# Altium PCB Red.PcbDoc (part 3 of 3)
Units mm, origin at the board's own origin, x right, y up, seen from the top; angles counter-clockwise.
Board outline 152.4 x 101.6 mm, 4 copper layers (Top Layer, VCC, GND, Bottom Layer); 97 components, 56 nets, 284 pads, 185 vias.
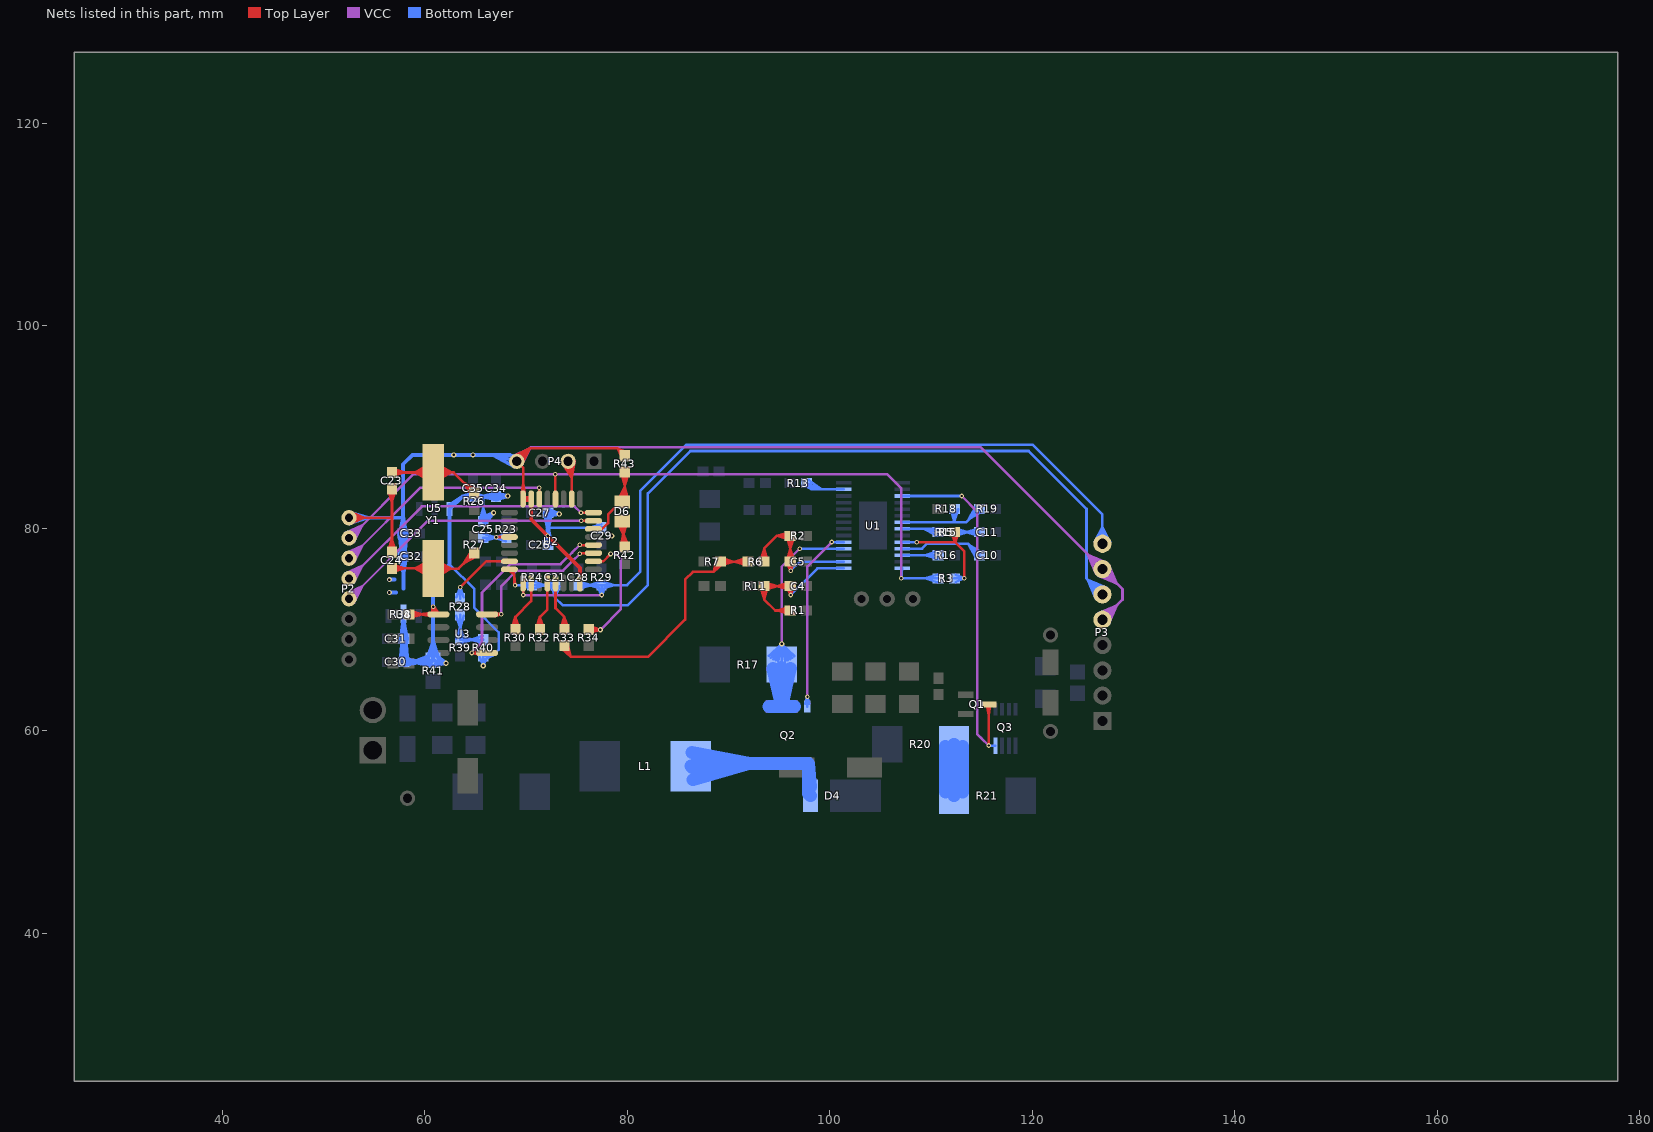
[diagram p5: the nets of this part, all layers, seen from the top]

## Via types
v1: diameter 0.457, hole 0.229, Top Layer to Bottom Layer, tented both sides, 92 vias
v2: diameter 0.508, hole 0.254, Top Layer to Bottom Layer, tented both sides, 85 vias
v3: diameter 0.508, hole 0.254, Top Layer to Bottom Layer, 8 vias

## Nets (pads, with @x,y where several pads share a name; then routed paths per layer and width w, separated by ;. In a path a pad name is that pad's centre, name@x,y a point inside that pad or via, vN(x,y) a via of type N, cw(c..) or ccw(c..) an arc to the next point about the centre after c; other vN are vias at no path point) (continued)
LP-: C23.2 C24.2 C25.1 C26.2 C27.1 C29.1 C30.1 C31.1 C32.1 C33.1 C34.1 C35.1 P2.8 P3.5 P3.7 P4.4 R38.1 R40.2 R41.1 R43.2 U2.16 U2.31 U2.32 U3.5 U4.2 U5.1 | length 441
  Top Layer w0.254: P2.8@52.518,81.041 54.03,81.026 ; P2.8@52.559,80.674 54.03,81.026 ; P2.8@52.567,81.407 54.03,81.026 ; P2.8@52.615,81.026 56.769,81.026 ; P2.8@52.64,80.43 54.03,81.026 ; P2.8@52.652,81.649 54.03,81.026 ; C24.2@56.4,77.74 56.769,78.947 ; C23.2@56.4,83.804 56.769,82.597 ; C24.2@56.769,77.635 56.769,81.026 ; C24.2@56.769,77.685 56.769,78.947 ; C23.2@56.769,83.859 56.769,82.597 ; C23.2@56.769,83.909 56.769,81.026 ; C24.2@57.138,77.74 56.769,78.947 ; C23.2@57.138,83.804 56.769,82.597 ; R38.1@58.458,71.501 U3.5@60.833,71.501 ; R38.1@58.508,71.501 59.77,71.501 ; R38.1@58.563,71.132 59.77,71.501 ; R38.1@58.563,71.87 59.77,71.501 ; U3.5@60.54,71.329 59.492,71.501 ; U3.5@60.54,71.673 59.492,71.501 ; U3.5@60.554,71.501 59.492,71.501 ; P4.4@68.731,87.124 70.358,87.884 ; P4.4@68.855,86.9 70.358,87.884 ; P4.4@69.088,86.614 70.358,87.884 ; P4.4@69.374,86.381 70.358,87.884 ; U2.32@69.569,83.476 69.717,84.502 ; P4.4@69.598,86.257 70.358,87.884 ; U2.32@69.717,83.465 69.717,84.502 ; U2.32@69.865,83.476 69.717,84.502 ; U2.31@70.476,82.748 U2.32@69.731,83.037 ; U2.31@70.476,83.032 U2.32@69.731,82.743 ; U2.31@70.503,82.743 U2.32@69.717,82.89 ; U2.31@70.503,83.037 U2.32@69.717,82.89 ; U2.31@70.531,82.743 U2.32@69.731,82.743 ; U2.31@70.531,83.037 U2.32@69.731,83.037 ; R43.2@79.455,86.99 79.032,87.884 ; R43.2@79.756,87.16 79.032,87.884 ; R43.2@79.756,87.21 79.032,87.884 ; R43.2@79.954,87.526 79.032,87.884 ; U2.32@69.717,82.89 69.717,85.985 69.215,86.487 69.215,86.741 70.358,87.884 ; U2.32@69.717,82.89 U2.31@70.517,82.89 ; U2.32@69.731,82.743 U2.31@70.517,82.89 ; U2.32@69.731,83.037 U2.31@70.517,82.89 ; 70.358,87.884 79.032,87.884
  Top Layer w0.381: U3.5@60.833,71.501 v1(60.833,72.263) U3.5@61.354,71.501 ; 70.517,80.897 U2.31@70.517,82.315 ; U2.31@70.517,82.89 70.517,80.867 75.317,76.067 ; U2.16@75.317,74.59 75.317,76.067 ; U2.16@75.317,75.165 75.317,76.067
  VCC w0.254: P4.4@68.729,87.123 70.377,87.903 ; P4.4@68.855,86.9 70.377,87.903 ; P4.4@69.088,86.614 70.485,88.011 114.883,88.011 P3.7@126.921,75.973 ; P4.4@69.374,86.381 70.377,87.903 ; P4.4@69.597,86.255 70.377,87.903 ; P3.7@126.281,75.54 125.482,77.412 ; P3.5@126.488,71.613 128.36,72.412 ; P3.7@126.488,75.333 128.36,74.534 ; P3.7@126.51,75.656 125.482,77.412 ; P3.5@126.604,71.384 128.36,72.412 ; P3.7@126.604,75.562 128.36,74.534 ; P3.7@126.722,75.798 125.482,77.412 ; P3.5@126.746,71.172 128.36,72.412 ; P3.7@126.746,75.774 128.36,74.534 ; P3.5@126.921,70.973 128.905,72.957 128.905,73.989 P3.7@126.921,75.973 ; P3.7@127.096,76.172 125.482,77.412 ; P3.5@127.12,70.798 128.36,72.412 ; P3.7@127.12,76.148 128.36,74.534 ; P3.7@127.238,76.384 125.482,77.412 ; P3.5@127.332,70.656 128.36,72.412 ; P3.7@127.332,76.29 128.36,74.534 ; P3.7@127.354,76.613 125.482,77.412 ; P3.5@127.561,70.54 128.36,72.412 ; P3.7@127.561,76.406 128.36,74.534 ; 125.482,77.412 P3.7@126.921,75.973
  Bottom Layer w0.254: 62.46,76.43 64.897,73.993 64.897,72.136 67.31,69.723 67.31,68.034 66.675,67.399 ; C25.1@65.417,80.788 65.786,81.995 ; R40.2@65.421,67.274 v2(65.786,66.421) ; R40.2@65.786,66.956 v2(65.786,66.421) ; R40.2@65.786,67.349 v2(65.786,66.421) ; R40.2@65.786,67.399 66.675,67.399 ; C25.1@65.786,80.683 65.786,83.147 ; C25.1@65.786,80.733 65.786,81.995 ; R40.2@65.864,67.034 66.675,67.399 ; R40.2@65.864,67.764 66.675,67.399 ; R40.2@66.151,67.274 v2(65.786,66.421) ; C25.1@66.155,80.788 65.786,81.995 ; 72.212,80.048 C29.1@77.47,80.048 ; C29.1@77.415,79.679 76.208,80.048 C29.1@77.415,80.417
  Bottom Layer w0.381: P2.8@52.518,81.041 54.411,81.041 ; P2.8@52.6,81.041 57.874,81.041 ; P2.8@52.601,80.488 54.411,81.041 ; P2.8@52.601,81.594 54.411,81.041 ; v2(56.515,73.66) 57.15,73.66 ; v2(56.515,74.93) 57.023,74.93 ; C33.1@57.515,79.499 57.684,77.798 ; C33.1@57.565,79.481 C32.1@57.874,77.216 ; C33.1@57.566,79.531 57.874,81.145 C33.1@58.182,79.531 ; C32.1@57.567,77.18 57.912,75.572 ; C32.1@57.567,77.252 57.912,78.86 ; C33.1@57.567,79.466 57.912,77.858 ; C33.1@57.566,79.533 57.874,81.041 ; C30.1@57.591,66.804 57.756,68.463 ; C33.1@57.62,79.444 58.079,77.861 ; C30.1@57.642,66.831 57.95,68.445 C30.1@58.258,66.831 ; C31.1@57.642,69.059 57.95,67.445 ; C31.1@57.641,69.11 U4.2@57.912,70.732 ; C30.1@57.695,66.857 58.144,68.463 ; C31.1@57.703,69.478 U4.2@57.912,70.952 ; C33.1@57.824,79.502 57.684,77.798 ; C30.1@57.9,66.802 57.756,68.463 ; C31.1@57.912,69.509 U4.2@57.912,70.952 ; U4.2@57.912,71.552 57.912,69.126 C31.1@57.95,69.088 ; 57.912,74.041 57.912,79.464 C33.1@57.874,79.502 ; C31.1@57.94,69.508 U4.2@57.912,70.952 ; C30.1@58.029,66.494 59.643,66.802 ; C30.1@58.029,67.11 59.643,66.802 ; C33.1@58.129,79.449 57.684,77.798 ; C32.1@58.183,77.194 57.912,75.572 ; C32.1@58.183,77.238 57.912,78.86 ; C33.1@58.183,79.48 57.912,77.858 ; C33.1@58.183,79.481 C32.1@57.874,77.216 ; C33.1@58.182,79.533 57.874,81.041 ; C31.1@58.184,69.467 U4.2@57.912,70.952 ; C30.1@58.205,66.857 57.756,68.463 ; C33.1@58.233,79.502 58.079,77.861 ; C31.1@58.257,69.124 U4.2@57.912,70.732 ; C31.1@58.258,69.059 57.95,67.445 ; C30.1@58.309,66.804 58.144,68.463 ; R41.1@60.28,67.046 60.833,68.856 R41.1@61.386,67.046 ; R41.1@60.705,67.508 58.928,66.802 ; R41.1@60.798,66.405 58.928,66.802 ; R41.1@60.829,66.404 v2(62.103,66.675) ; R41.1@61.071,67.469 v2(62.103,66.675) ; R41.1@61.121,66.675 v2(62.103,66.675) ; 62.46,80.05 U5.1@62.46,81.493 ; U5.1@62.46,82.293 63.568,83.001 ; C35.1@64.725,82.841 63.714,83.147 ; C35.1@64.725,83.453 63.714,83.147 ; C35.1@64.817,82.841 65.786,83.147 ; C35.1@64.817,83.453 65.786,83.147 ; C25.1@65.625,80.997 v2(66.802,81.534) ; C25.1@65.786,80.733 v2(66.802,81.534) ; C25.1@65.951,80.683 v2(66.802,81.534) ; C25.1@66.005,80.515 v2(66.802,81.534) ; C34.1@67.018,82.84 65.786,83.147 ; C34.1@67.018,83.454 65.786,83.147 ; C34.1@67.088,83.455 v2(68.199,83.185) ; C34.1@67.094,83.185 v2(68.199,83.185) ; C34.1@67.108,82.842 v2(68.199,83.185) ; P4.4@68.883,86.093 66.71,87.249 ; P4.4@69.17,87.167 66.71,87.249 ; C27.1@71.866,81.505 72.174,79.891 C27.1@72.482,81.505 ; 72.174,80.622 v1(72.136,79.248) ; C27.1@72.174,81.534 C26.2@72.174,78.359 v1(72.136,79.248) ; C27.1@72.224,81.534 v2(73.279,81.407) ; C27.1@72.232,81.225 v2(73.279,81.407) ; C27.1@72.301,81.407 v2(73.279,81.407) ; C27.1@72.305,81.833 v2(73.279,81.407) ; C29.1@77.47,80.048 C29.1@77.686,80.048 ; C33.1@57.622,79.433 57.912,78.86 ; C33.1@57.622,79.433 57.912,78.86 ; C33.1@57.622,79.433 57.912,78.86 ; C32.1@57.874,77.216 C33.1@57.874,79.502 ; C32.1@57.874,77.216 57.912,75.572 ; C32.1@57.874,77.216 57.912,78.86 ; C33.1@57.874,79.502 57.912,77.858 ; C33.1@57.874,79.502 57.874,81.041 ; C33.1@57.874,79.502 57.874,86.322 58.801,87.249 68.453,87.249 P4.4@69.088,86.614 66.71,87.249 ; U4.2@57.912,70.732 C31.1@57.95,69.088 ; 57.912,78.86 C33.1@57.924,79.502 ; 57.912,78.86 C33.1@58.223,79.422 ; 57.912,78.86 C33.1@57.924,79.502 ; 57.912,78.86 C33.1@58.223,79.422 ; 57.912,78.86 C33.1@57.924,79.502 ; 57.912,78.86 C33.1@58.223,79.422 ; C33.1@57.924,79.502 58.079,77.861 ; C30.1@57.95,66.802 57.95,67.445 ; C30.1@57.95,66.802 57.95,67.445 ; C30.1@57.95,66.802 60.672,66.802 R41.1@60.833,66.963 ; C30.1@57.95,66.802 C31.1@57.95,69.088 ; 57.95,67.445 58.25,66.876 57.95,67.445 ; 57.95,67.445 57.65,66.876 57.95,67.445 ; 58.144,68.463 58,66.802 59.643,66.802 ; 58.928,66.802 R41.1@60.833,66.963 ; R41.1@60.833,66.963 v2(62.103,66.675) ; R41.1@60.833,66.963 v1(60.833,72.263) 60.833,74.803 62.46,76.43 U5.1@62.46,81.893 63.714,83.147 ; 63.714,83.147 C35.1@64.77,83.147 65.786,83.147 ; 65.786,83.147 C34.1@67.056,83.147 v2(68.199,83.185) ; v1(72.136,79.248) 72.174,80.002 ; v1(72.136,79.248) 72.482,78.388 72.174,80.002 ; v1(72.136,79.248) 71.866,78.388 72.174,80.002 ; v1(72.136,79.248) 72.174,80.002
  other v2: 78.486,79.248 62.865,87.249 64.77,87.249
NetC4_1: C4.1 R1.2 R11.2 U1.15 | length 31.6
  Top Layer w0.254: R11.2@93.141,74.24 93.51,73.033 R11.2@93.879,74.24 ; R11.2@93.56,74.295 94.822,74.295 ; R11.2@93.615,73.926 94.822,74.295 ; R11.2@93.615,74.664 94.822,74.295 ; C4.1@95.74,74.201 v1(96.139,73.406) ; R1.2@95.996,71.513 94.789,71.882 ; R1.2@95.996,72.251 94.789,71.882 ; C4.1@95.996,73.926 94.789,74.295 ; C4.1@95.996,74.664 94.789,74.295 ; R1.2@96.051,71.882 94.789,71.882 ; C4.1@96.051,74.295 94.789,74.295 ; R1.2@96.101,71.882 94.615,71.882 93.51,72.987 R11.2@93.51,74.295 C4.1@96.101,74.295 v1(96.139,73.406) ; C4.1@96.139,74.257 v1(96.139,73.406) ; C4.1@96.469,74.232 v1(96.139,73.406)
  Bottom Layer w0.254: v1(96.139,73.406) 98.772,76.039 U1.15@101.392,76.039 ; 99.855,76.039 U1.15@100.792,76.039
NetC5_2: C5.2 R2.2 R6.2 U1.16 | length 30.1
  Top Layer w0.254: R6.2@93.141,76.763 93.51,77.97 R6.2@93.879,76.763 ; R6.2@93.51,76.708 93.51,78.016 94.742,79.248 R2.2@96.101,79.248 C5.2@96.101,76.708 ; C5.2@95.732,76.763 96.101,77.97 C5.2@96.47,76.763 ; R2.2@95.732,79.193 96.101,77.986 R2.2@96.47,79.193 ; R2.2@95.996,78.879 94.789,79.248 ; R2.2@95.996,79.617 94.789,79.248 ; R2.2@96.051,79.248 94.789,79.248 ; v1@96.101,75.857 95.737,76.626 v1(96.139,75.819) ; v1@96.101,75.857 96.465,76.626 v1(96.139,75.819) ; v1@96.101,75.857 C5.2@96.101,76.708 ; v1@96.101,75.857 v1(96.139,75.819) ; C5.2@96.101,76.708 v1(96.139,75.819)
  Bottom Layer w0.254: v1(96.139,75.819) 97.009,76.689 U1.16@101.392,76.689 ; 99.855,76.689 U1.16@100.792,76.689
NetC10_1: C10.1 U1.11 | length 13.5
  Bottom Layer w0.254: U1.11@107.142,77.989 109.104,77.989 109.601,78.486 113.627,78.486 C10.1@114.77,77.343 ; U1.11@107.742,77.989 108.679,77.989 ; C10.1@114.419,77.123 113.731,78.382 ; C10.1@114.72,77.343 113.731,78.382 ; C10.1@114.954,77.633 113.731,78.382
NetC11_1: C11.1 R15.2 | length 10
  Bottom Layer w0.254: R15.2@112.306,79.629 C11.1@114.77,79.629 ; R15.2@112.356,79.629 113.618,79.629 ; R15.2@112.411,79.26 113.618,79.629 ; R15.2@112.411,79.998 113.618,79.629 ; C11.1@114.665,79.26 113.458,79.629 ; C11.1@114.665,79.998 113.458,79.629 ; C11.1@114.72,79.629 113.458,79.629
NetC25_2: C25.2 R23.1 U2.4 | length 16.1
  Top Layer w0.254: v1(67.056,79.121) U2.4@68.047,79.14 ; v1@67.075,79.14 U2.4@68.367,79.14
  Bottom Layer w0.254: C25.2@65.786,79.083 R23.1@68.072,79.083 ; C25.2@65.841,78.714 67.048,79.083 C25.2@65.841,79.452 ; C25.2@66.063,79.083 v1(67.056,79.121) ; C25.2@66.088,79.377 v1(67.056,79.121) ; C25.2@66.105,78.795 v1(67.056,79.121) ; R23.1@67.997,78.72 v1(67.056,79.121) ; R23.1@68.007,79.449 v1(67.056,79.121) ; R23.1@68.017,78.714 66.81,79.083 ; R23.1@68.017,79.452 66.81,79.083 ; R23.1@68.048,79.083 v1(67.056,79.121) ; 66.81,79.083 v1(67.056,79.121) ; 66.81,79.083 v1(67.056,79.121)
NetD4_1: D4.1 L1.2 Q2.5 Q2.6 Q2.7 Q2.8 | length 39.5
  Bottom Layer w1.27: L1.2@86.288,56.515 92.11,56.769 ; L1.2@86.389,57.876 92.11,56.769 ; L1.2@86.415,56.388 86.796,56.769 Q2.8@93.878,56.769 Q2.7@95.225,56.769 Q2.6@96.545,56.769 Q2.5@97.892,56.769 ; L1.2@86.507,55.168 92.11,56.769 ; D4.1@98.091,53.594 D4.1@97.892,53.793 ; D4.1@97.892,53.793 97.892,56.494 98.091,54.444 Q2.5@97.892,56.769 ; D4.1@97.892,53.793 Q2.5@97.892,56.769
NetD6_1: D6.1 R42.1 | length 13.6
  Top Layer w0.254: D6.1@78.998,80.57 79.629,79.288 ; D6.1@79.238,80.662 79.629,79.288 ; D6.1@79.375,80.711 79.629,80.457 R42.1@79.629,78.143 ; R42.1@79.383,78.211 79.629,79.463 ; D6.1@79.502,80.711 79.629,79.288 ; R42.1@79.756,78.193 79.629,79.463 ; D6.1@79.771,80.71 79.629,79.288 ; D6.1@80.023,80.661 79.629,79.288 ; R42.1@80.118,78.284 79.629,79.463
NetQ1_3: Q1.3 Q3.4 U1.3 | length 44.4
  Top Layer w0.254: Q1.3@115.507,62.597 115.679,61.549 Q1.3@115.851,62.597 ; 115.679,59.538 v1(115.697,58.547) 115.679,58.565 Q1.3@115.679,62.611
  VCC w0.254: v1(113.03,83.185) 114.554,81.661 114.554,59.69 v1(115.697,58.547) 114.93,59.314
  Bottom Layer w0.254: U1.3@107.142,83.189 v1@113.026,83.189 ; U1.3@107.742,83.189 108.679,83.189 ; 112.039,83.189 v1(113.03,83.185) ; Q3.4@116.358,58.536 v1(115.697,58.547) Q3.4@116.358,58.536 ; Q3.4@116.358,58.536 115.708,58.536 Q3.4@116.358,58.536
NetQ2_1: Q2.1 Q2.2 Q2.3 R17.2 U1.18 | length 71.2
  VCC w0.254: v2(95.25,68.58) 95.25,76.2 v1(97.028,77.978)
  Bottom Layer w0.254: R17.2@93.988,67.394 v2(95.25,68.58) ; R17.2@94.189,67.211 v2(95.25,68.58) ; R17.2@94.411,67.065 v2(95.25,68.58) ; R17.2@94.647,66.956 v2(95.25,68.58) ; R17.2@94.893,66.885 v2(95.25,68.58) ; R17.2@95.248,66.04 95.25,66.042 v2(95.25,68.58) ; R17.2@95.248,66.848 v2(95.25,68.58) ; R17.2@95.603,66.884 v2(95.25,68.58) ; R17.2@95.85,66.955 v2(95.25,68.58) ; R17.2@96.086,67.063 v2(95.25,68.58) ; R17.2@96.307,67.208 v2(95.25,68.58) ; R17.2@96.509,67.391 v2(95.25,68.58) ; v1(97.028,77.978) 98.019,77.989 ; v1@97.039,77.989 U1.18@101.392,77.989 ; 99.855,77.989 U1.18@100.792,77.989
  Bottom Layer w1.27: Q2.1@93.98,62.388 Q2.2@95.25,62.388 ; R17.2@95.248,66.04 R17.2@95.25,66.038 ; Q2.2@95.25,62.388 Q2.3@96.52,62.388 Q2.2@95.25,62.388 ; Q2.2@95.25,62.388 95.248,66.248 Q2.2@95.25,62.663 ; Q2.2@95.25,62.388 94.388,66.151 Q2.2@95.25,62.663 ; Q2.2@95.25,62.388 96.108,66.152 Q2.2@95.25,62.663 ; Q2.2@95.25,62.388 R17.2@95.25,66.038 ; Q2.2@95.25,62.663 R17.2@95.25,66.038
NetQ2_4: Q2.4 U1.19 | length 21.2
  VCC w0.254: v1(97.79,63.373) 97.79,76.226 v1(100.203,78.639)
  Bottom Layer w0.254: Q2.4@97.594,62.691 v1(97.79,63.373) ; Q2.4@97.79,62.388 v1(97.79,63.373) ; Q2.4@97.79,62.663 v1(97.79,63.373) ; Q2.4@97.986,62.691 v1(97.79,63.373) ; U1.19@100.792,78.639 v1(100.203,78.639) U1.19@101.392,78.639
NetR13_2: R13.2 U1.27 | length 14.2
  Bottom Layer w0.254: R13.2@97.648,84.096 99.223,83.839 ; R13.2@97.701,84.328 98.19,83.839 ; R13.2@97.934,84.78 99.223,83.839 ; 99.855,83.839 U1.27@100.792,83.839 ; U1.27@101.392,83.839 98.19,83.839 ; R13.2@97.751,84.455 98.19,83.839 ; R13.2@97.751,84.455 99.223,83.839 ; R13.2@97.751,84.455 98.19,83.839 ; 98.19,83.839 97.51,84.17 98.19,83.839 ; 98.19,83.839 98.099,84.59 98.19,83.839
NetR15_1: R15.1 U1.8 | length 8.9
  Bottom Layer w0.254: U1.8@107.142,79.939 110.396,79.939 R15.1@110.706,79.629 ; U1.8@107.742,79.939 108.679,79.939 ; R15.1@110.527,79.279 109.279,79.939 ; R15.1@110.656,79.629 109.279,79.939 ; R15.1@110.689,80.001 109.279,79.939
NetR16_1: R16.1 U1.12 | length 8.3
  Bottom Layer w0.254: U1.12@107.142,77.339 110.702,77.339 R16.1@110.706,77.343 ; U1.12@107.742,77.339 108.679,77.339 ; R16.1@110.6,77.712 109.394,77.339 ; R16.1@110.602,76.974 109.394,77.339 ; R16.1@110.656,77.343 109.394,77.339
NetR18_1: R18.1 R19.1 U1.7 | length 18.4
  Bottom Layer w0.254: U1.7@107.142,80.589 113.444,80.589 R19.1@114.77,81.915 ; U1.7@107.742,80.589 108.679,80.589 ; R18.1@111.937,81.859 112.306,80.678 ; R18.1@112.675,81.859 112.306,80.678 ; R19.1@114.419,82.135 113.731,80.876 ; R19.1@114.72,81.915 113.731,80.876 ; R19.1@114.954,81.625 113.731,80.876 ; 112.306,80.678 R18.1@112.306,81.915 112.306,80.678
NetR20_1: R20.1 R21.2 | length 74.1
  Bottom Layer w1.27: R20.1@111.405,58.296 R21.2@112.266,53.598 ; R20.1@111.405,58.457 R21.2@111.408,53.972 ; R20.1@111.405,58.29 R21.2@112.27,53.894 ; R20.1@111.437,58.126 R21.2@113.131,53.973 ; R21.2@112.27,53.594 R21.2@112.266,53.598 ; R20.1@113.095,58.128 R21.2@111.408,53.972 ; R20.1@113.127,58.291 R21.2@112.27,53.894 ; R20.1@113.127,58.458 R21.2@113.131,53.973 ; R20.1@113.127,58.296 R21.2@112.266,53.598 ; R21.2@111.408,53.972 R20.1@112.266,58.374 ; R21.2@111.408,53.972 R20.1@112.266,58.674 ; R21.2@112.266,53.598 R20.1@112.266,58.374 ; R21.2@112.266,53.598 R20.1@112.266,58.674 ; R20.1@112.266,58.374 R21.2@112.27,53.894 ; R20.1@112.266,58.374 R21.2@113.131,53.973 ; R20.1@112.266,58.674 R21.2@112.27,53.894 ; R20.1@112.266,58.674 R21.2@113.131,53.973
NetR28_2: R28.2 U2.7 | length 13.2
  Top Layer w0.254: v1(63.5,74.168) 66.072,76.74 U2.7@68.367,76.74
  Bottom Layer w0.254: R28.2@63.133,73.179 v1(63.5,74.168) ; R28.2@63.15,73.225 v1(63.5,74.168) ; R28.2@63.5,73.063 v1(63.5,74.168) ; R28.2@63.5,73.113 v1(63.5,74.168) ; R28.2@63.867,73.179 v1(63.5,74.168) ; v1(63.5,74.168) 63.5,73.177 v1(63.5,74.168)
NetR30_1: R30.1 U2.10 | length 8.8
  Top Layer w0.254: R30.1@68.593,70.124 68.961,71.247 ; R30.1@68.961,70.015 68.961,71.247 ; R30.1@68.961,70.065 68.961,71.247 ; R30.1@69.329,70.124 68.961,71.247 ; U2.10@70.517,74.59 70.517,72.803 68.961,71.247
NetR32_1: R32.1 U2.12 | length 8.4
  Top Layer w0.254: R32.1@71.006,70.124 71.374,71.247 ; R32.1@71.374,70.015 71.374,71.247 ; R32.1@71.374,70.065 71.374,71.247 ; R32.1@71.742,70.124 71.374,71.247 ; U2.12@72.117,74.59 72.117,71.99 71.374,71.247
NetR33_1: R33.1 U2.13 | length 8.5
  Top Layer w0.254: U2.13@72.917,74.59 72.917,72.117 73.787,71.247 ; R33.1@73.419,70.124 73.787,71.247 ; R33.1@73.787,70.015 73.787,71.247 ; R33.1@73.787,70.065 73.787,71.247 ; R33.1@74.155,70.124 73.787,71.247
NetR34_1: R34.1 U2.18 | length 16.7
  Top Layer w0.254: R34.1@76.249,69.645 v2(77.343,69.977) ; R34.1@76.273,70.381 v2(77.343,69.977) ; U2.18@76.667,76.74 77.629,76.74 ; v2(77.343,69.977) R34.1@76.2,70.015 76.238,69.977 v2(77.343,69.977) ; 77.629,76.74 v2(78.359,77.47) 77.629,76.74
  VCC w0.254: v2(77.343,69.977) 79.375,72.009 79.375,76.962 78.867,77.47 v2(78.359,77.47)
NTC1+: C21.2 P3.6 R24.2 U2.8 | length 110.5
  Top Layer w0.254: U2.8@68.275,75.824 68.834,75.473 ; U2.8@68.367,75.94 68.834,75.473 ; U2.8@68.483,76.032 68.834,75.473 ; v1@68.834,74.422 68.834,75.473 ; 68.834,75.387 v1(68.923,74.384)
  Bottom Layer w0.254: v1(68.923,74.384) R24.2@70.612,74.384 C21.2@72.898,74.384 72.885,74.371 72.885,73.139 ; R24.2@70.557,74.015 69.35,74.384 R24.2@70.557,74.753 ; R24.2@70.667,74.015 71.874,74.384 R24.2@70.667,74.753 ; C21.2@72.529,74.28 72.885,73.139 ; C21.2@72.843,74.015 71.636,74.384 C21.2@72.843,74.753 ; C21.2@72.898,74.334 72.885,73.139 ; C21.2@73.266,74.272 72.885,73.139 ; P3.6@126.281,73.04 125.482,74.912 ; P3.6@126.51,73.156 125.482,74.912 ; P3.6@126.722,73.298 125.482,74.912 ; P3.6@127.096,73.672 125.482,74.912 ; P3.6@127.238,73.884 125.482,74.912 ; P3.6@127.354,74.113 125.482,74.912 ; 72.885,73.139 73.635,72.39 80.01,72.39 82.042,74.422 82.042,83.439 86.233,87.63 119.634,87.63 125.349,81.915 125.349,75.045 P3.6@126.921,73.473 125.482,74.912
NTC2+: C28.2 P3.8 R29.2 U2.9 | length 102.4
  Top Layer w0.254: U2.9@69.717,74.59 69.717,74.162 69.723,74.156 v1(69.723,73.406)
  VCC w0.254: v1(69.723,73.406) v1(77.47,73.406)
  Bottom Layer w0.254: C28.2@75.184,74.384 R29.2@77.47,74.384 ; C28.2@75.239,74.015 76.446,74.384 C28.2@75.239,74.753 ; R29.2@77.415,74.015 76.208,74.384 R29.2@77.415,74.753 ; R29.2@77.525,74.015 78.732,74.384 R29.2@77.525,74.753 ; P3.8@126.169,78.653 126.921,80.135 ; P3.8@126.408,78.554 126.921,80.135 ; P3.8@126.657,78.494 126.921,80.135 ; P3.8@126.921,78.473 126.921,81.359 120.015,88.265 85.852,88.265 81.28,83.693 81.28,75.692 79.972,74.384 R29.2@77.47,74.384 ; P3.8@127.185,78.494 126.921,80.135 ; P3.8@127.434,78.554 126.921,80.135 ; P3.8@127.673,78.653 126.921,80.135 ; v1@77.47,73.279 77.47,74.334 v1(77.47,73.406) ; v1@77.47,73.279 77.103,74.268 v1(77.47,73.406) ; v1@77.47,73.279 77.837,74.268 v1(77.47,73.406) ; v1@77.47,73.279 R29.2@77.47,74.384 ; v1(77.47,73.406) R29.2@77.47,74.384
OSC_N: C24.1 R27.1 Y1.1 | length 46.4
  Top Layer w0.254: C24.1@56.769,76.035 Y1.1@60.82,76.035 ; C24.1@56.824,75.666 58.031,76.035 C24.1@56.824,76.404 ; Y1.1@60.592,75.131 59.021,76.035 ; Y1.1@60.604,76.916 59.021,76.035 ; Y1.1@60.705,75.365 59.021,76.035 ; Y1.1@60.714,76.68 59.021,76.035 ; Y1.1@60.783,75.61 59.021,76.035 ; Y1.1@60.788,76.435 59.021,76.035 ; Y1.1@60.825,75.861 59.021,76.035 ; Y1.1@60.827,76.183 59.021,76.035 ; Y1.1@60.84,75.861 62.645,76.022 ; Y1.1@60.84,76.183 62.645,76.022 ; Y1.1@60.881,75.61 62.645,76.022 ; Y1.1@60.881,76.434 62.645,76.022 ; Y1.1@60.956,75.364 62.645,76.022 ; Y1.1@60.956,76.68 62.645,76.022 ; Y1.1@61.068,75.129 62.645,76.022 ; Y1.1@61.068,76.915 62.645,76.022 ; R27.1@64.607,77.743 63.858,76.52 ; R27.1@64.897,77.509 63.858,76.52 ; R27.1@64.897,77.559 63.36,76.022 Y1.1@60.833,76.022 59.021,76.035 ; R27.1@65.117,77.208 63.858,76.52
OSC_P: C23.1 R26.1 Y1.2 | length 46.6
  Top Layer w0.254: C23.1@56.769,85.509 Y1.2@60.82,85.509 ; C23.1@56.824,85.14 58.031,85.509 C23.1@56.824,85.878 ; Y1.2@60.592,86.413 59.021,85.509 ; Y1.2@60.604,84.628 59.021,85.509 ; Y1.2@60.705,86.179 59.021,85.509 ; Y1.2@60.714,84.864 59.021,85.509 ; Y1.2@60.783,85.934 59.021,85.509 ; Y1.2@60.788,85.109 59.021,85.509 ; Y1.2@60.825,85.683 59.021,85.509 ; Y1.2@60.827,85.361 59.021,85.509 ; Y1.2@60.84,85.361 62.645,85.522 ; Y1.2@60.84,85.683 62.645,85.522 ; Y1.2@60.881,85.11 62.645,85.522 ; Y1.2@60.881,85.934 62.645,85.522 ; Y1.2@60.956,84.864 62.645,85.522 ; Y1.2@60.956,86.18 62.645,85.522 ; Y1.2@61.068,84.629 62.645,85.522 ; Y1.2@61.068,86.415 62.645,85.522 ; R26.1@64.607,83.293 63.858,84.516 ; R26.1@64.897,83.477 62.852,85.522 Y1.2@60.833,85.522 59.021,85.509 ; R26.1@64.897,83.527 63.858,84.516 ; R26.1@65.117,83.828 63.858,84.516
PWM: P2.7 R3.2 U1.14 U2.28 | length 88.3
  Top Layer w0.254: U2.28@72.898,82.909 v1(72.898,85.344)
  VCC w0.254: P2.7@52.176,79.562 53.844,80.285 ; P2.7@52.294,79.334 53.844,80.285 ; P2.7@52.518,79.041 53.844,80.285 ; P2.7@52.6,79.041 58.903,85.344 105.664,85.344 107.061,83.947 v1(107.061,75.057) ; P2.7@52.796,78.799 53.844,80.285 ; P2.7@53.016,78.666 53.844,80.285
  Bottom Layer w0.254: v1@107.061,75.081 U1.14@107.142,76.039 v1(107.061,75.057) ; U1.14@107.061,75.958 v1(107.061,75.057) ; R3.2@110.601,74.688 109.394,75.057 ; R3.2@110.601,75.426 109.394,75.057 ; R3.2@110.656,75.057 109.394,75.057 ; R3.2@110.706,75.057 v1(107.061,75.057)
RXD: U2.20 U3.1 | length 25
  Top Layer w0.254: U3.1@65.333,67.519 v1(64.643,67.691) ; U3.1@65.333,67.863 v1(64.643,67.691) ; U3.1@65.354,67.691 v1(64.643,67.691) ; U3.1@66.154,67.691 v1(64.643,67.691) ; v1(75.311,78.359) U2.20@76.302,78.34 ; v1@75.33,78.34 U2.20@76.667,78.34
  VCC w0.254: v1(64.643,67.691) 65.659,68.707 65.659,73.66 68.453,76.454 73.406,76.454 v1(75.311,78.359) 74.544,77.592
STATE: D6.2 R43.1 U2.22 | length 20.3
  Top Layer w0.254: U2.22@76.667,79.94 77.527,79.94 ; D6.2@79.099,82.756 79.756,84.088 ; D6.2@79.338,82.663 79.756,84.088 ; R43.1@79.387,85.455 79.756,84.248 ; D6.2@79.602,82.611 79.756,84.088 ; R43.1@79.756,85.51 79.756,84.248 ; R43.1@79.756,85.56 79.756,82.992 78.105,81.341 78.105,80.518 77.527,79.94 ; D6.2@79.871,82.607 79.756,84.088 ; D6.2@80.124,82.649 79.756,84.088 ; R43.1@80.125,85.455 79.756,84.248 ; 77.527,79.94 77.242,79.94 77.527,79.94 ; 77.527,79.94 77.28,79.797 77.527,79.94 ; 77.527,79.94 77.28,80.083 77.527,79.94
SWCLK: P2.5 U2.24 | length 37.4
  Top Layer w0.254: v1(75.438,81.534) U2.24@76.429,81.54 ; v1@75.444,81.54 U2.24@76.667,81.54
  VCC w0.254: P2.5@52.176,75.562 53.845,76.286 ; P2.5@52.294,75.334 53.845,76.286 ; P2.5@52.518,75.041 53.845,76.286 ; P2.5@52.6,75.041 59.728,82.169 74.803,82.169 v1(75.438,81.534) ; P2.5@52.796,74.799 53.845,76.286 ; P2.5@53.016,74.666 53.845,76.286
SWDIO: P2.4 U2.23 | length 37.3
  Top Layer w0.254: v1(75.47,80.74) U2.23@76.667,80.74
  VCC w0.254: P2.4@52.176,73.562 53.845,74.286 ; P2.4@52.294,73.334 53.845,74.286 ; P2.4@52.518,73.041 53.845,74.286 ; P2.4@52.6,73.041 60.299,80.74 v1(75.47,80.74) 74.479,80.74 ; P2.4@52.796,72.799 53.845,74.286 ; P2.4@53.016,72.666 53.845,74.286
TEC: P2.6 U2.30 | length 31.9
  Top Layer w0.254: U2.30@71.317,82.89 v1(71.317,84.017)
  VCC w0.254: P2.6@52.176,77.562 53.844,78.285 ; P2.6@52.294,77.334 53.844,78.285 ; P2.6@52.796,76.799 53.844,78.285 ; P2.6@53.016,76.666 53.844,78.285 ; v1(71.317,84.017) 59.576,84.017 52.6,77.041 P2.6@52.518,77.041 53.844,78.285
TP1: P4.2 U2.26 | length 11.9
  Top Layer w0.254: P4.2@73.594,86.372 74.517,84.985 ; P4.2@73.818,86.497 74.517,84.985 ; P4.2@74.168,86.614 74.517,84.985 ; P4.2@74.295,86.36 74.517,86.138 U2.26@74.517,82.89 ; P4.2@74.535,86.651 74.517,84.985 ; P4.2@74.791,86.628 74.517,84.985
TXD: U2.19 U3.4 | length 18.5
  Top Layer w0.254: U3.4@66.154,71.501 v1(67.564,71.501) ; U3.4@66.954,71.501 v1(67.564,71.501) ; U3.4@66.979,71.33 v1(67.564,71.501) ; U3.4@66.979,71.672 v1(67.564,71.501) ; v1(75.311,77.47) U2.19@76.312,77.54 ; v1@75.381,77.54 U2.19@76.667,77.54
  VCC w0.254: v1(67.564,71.501) 67.564,74.295 69.088,75.819 73.66,75.819 v1(75.311,77.47) 74.544,76.703
UVP: R28.1 R39.2 R40.1 | length 17.4
  Bottom Layer w0.254: R39.2@63.131,69.104 63.5,70.311 ; R28.1@63.131,71.358 63.5,70.151 ; R39.2@63.5,69.049 63.5,70.311 ; R28.1@63.5,71.413 63.5,70.151 ; R28.1@63.5,71.463 R39.2@63.5,68.999 R40.1@65.786,68.999 ; R39.2@63.555,68.63 64.762,68.999 R39.2@63.555,69.368 ; R39.2@63.869,69.104 63.5,70.311 ; R28.1@63.869,71.358 63.5,70.151 ; R40.1@65.731,68.63 64.524,68.999 R40.1@65.731,69.368
V\M\O\D\E\: R6.1 R7.2 R33.2 | length 40
  Top Layer w0.254: R33.2@73.5,68.126 74.422,67.31 ; R33.2@73.787,68.365 74.422,67.31 ; R33.2@73.787,68.415 73.787,67.945 74.422,67.31 ; R33.2@74.132,68.507 74.422,67.31 ; R7.2@88.797,76.851 88.519,75.692 ; R7.2@89.142,76.708 88.519,75.692 ; R7.2@89.242,76.708 90.504,76.708 ; R7.2@89.297,76.339 90.504,76.708 ; R7.2@89.297,77.077 90.504,76.708 ; R7.2@89.426,76.466 88.519,75.692 ; R6.1@91.805,76.339 90.598,76.708 ; R6.1@91.805,77.077 90.598,76.708 ; R6.1@91.86,76.708 90.598,76.708 ; R6.1@91.91,76.708 89.319,76.708 89.319,76.492 88.519,75.692 ; 74.422,67.31 82.042,67.31 85.725,70.993 85.725,74.93 86.487,75.692 88.519,75.692
VREF: R3.1 R5.1 U1.10 | length 19.7
  Top Layer w0.254: v1(108.585,78.613) 112.395,78.613 ; R5.1@111.992,79.547 112.395,78.613 ; R5.1@112.306,79.629 112.395,79.54 112.395,78.613 ; R5.1@112.356,79.629 112.395,78.613 ; R5.1@112.725,79.575 112.395,78.613 ; v1(113.284,75.057) 113.284,77.724 112.395,78.613
  Bottom Layer w0.254: U1.10@107.142,78.639 v1@108.559,78.639 ; U1.10@107.593,78.639 v1(108.585,78.613) ; R3.1@112.306,75.057 v1(113.284,75.057) ; R3.1@112.356,75.057 v1(113.284,75.057) ; R3.1@112.431,74.692 v1(113.284,75.057) ; R3.1@112.431,75.422 v1(113.284,75.057) ; v1@108.559,78.639 107.742,78.639 v1(108.585,78.613) ; v1@108.559,78.639 v1(108.585,78.613)
pads on no net: R4.3 U2.25 U2.27 U2.29

## Polygon pours and split planes (outlines as drawn)
GND on Top Layer "IS_P" (solid, remove dead copper, pour order 2): 50.8,56.515 50.8,65.151 51.435,65.786 81.026,65.786 81.915,66.675 81.915,87.63 82.55,88.265 123.19,88.265 124.46,86.995 124.46,85.09 125.73,83.82 127.635,83.82 128.905,82.55 128.905,56.515 127.635,55.245 125.73,55.245 124.46,53.975 124.46,52.07 123.19,50.8 56.515,50.8 55.245,52.07 55.245,53.975 53.975,55.245 52.07,55.245 50.8,56.515
IS_P on Top Layer "IS_P" (solid, remove dead copper, pour order 4): 99.695,51.435 99.695,63.5 100.33,64.135 108.839,64.135 109.22,63.754 109.22,51.435 108.585,50.8 100.33,50.8 99.695,51.435
CS_P on Top Layer "IS_P" (solid, remove dead copper, pour order 3): 66.04,50.8 66.675,51.435 66.675,59.055 66.04,59.69 62.23,59.69 61.595,59.055 61.595,51.435 62.23,50.8
GND on Bottom Layer "IS_P" (solid, remove dead copper, pour order 7): 50.8,65.151 51.435,65.786 81.026,65.786 81.915,66.675 81.915,87.63 82.55,88.265 123.19,88.265 124.46,86.995 124.46,85.09 125.73,83.82 127.635,83.82 128.905,82.55 128.905,65.532 128.27,64.897 99.568,64.897 99.06,65.405 99.06,69.215 98.425,69.85 93.345,69.85 92.456,68.961 92.456,62.611 91.821,61.976 68.326,61.976 66.675,60.325 51.435,60.325 50.8,60.96 50.8,65.151
LD+ on Bottom Layer "IS_P" (solid, remove dead copper, pour order 9): 115.57,64.135 116.078,64.643 128.397,64.643 128.905,64.135 128.905,59.309 128.27,58.674 121.158,58.674 120.015,59.817 116.205,59.817 115.57,60.452 115.57,64.135
IS_N on Bottom Layer "IS_P" (solid, remove dead copper, pour order 11): 115.57,56.515 115.951,56.896 116.586,56.896 116.84,57.15 116.84,59.182 117.221,59.563 119.38,59.563 121.285,57.658 121.285,51.435 120.65,50.8 116.205,50.8 115.57,51.435 115.57,56.515
NetR20_1 on Bottom Layer "IS_P" (solid, remove dead copper, pour order 13): 109.855,60.325 110.49,60.96 114.3,60.96 114.935,60.325 114.935,51.435 114.3,50.8 110.49,50.8 109.855,51.435 109.855,60.198 109.855,60.325
IS_P on Bottom Layer "IS_P" (solid, remove dead copper, pour order 15): 99.695,63.5 100.33,64.135 108.839,64.135 109.22,63.754 109.22,51.435 108.585,50.8 100.33,50.8 99.695,51.435 99.695,63.5
NetQ2_1 on Bottom Layer "IS_P" (solid, remove dead copper, pour order 17): 93.472,61.595 93.091,61.976 93.091,68.707 93.599,69.215 97.79,69.215 98.425,68.58 98.425,64.262 98.044,63.881 97.536,63.881 97.155,63.5 97.155,61.849 96.901,61.595 93.472,61.595
NetD4_1 on Bottom Layer "IS_P" (solid, remove dead copper, pour order 19): 84.455,61.341 98.679,61.341 99.314,60.706 99.314,51.435 98.679,50.8 84.455,50.8 83.82,51.435 83.82,60.706
CS_N on Bottom Layer "IS_P" (solid, remove dead copper, pour order 21): 68.58,60.706 69.215,61.341 79.121,61.341 79.756,60.706 79.756,51.435 79.121,50.8 69.215,50.8 68.58,51.435 68.58,60.706
CS_P on Bottom Layer "IS_P" (solid, remove dead copper, pour order 23): 50.8,56.515 50.8,58.42 52.07,59.69 66.04,59.69 66.675,59.055 66.675,51.435 66.04,50.8 56.515,50.8 55.245,52.07 55.245,53.975 53.975,55.245 52.07,55.245 50.8,56.515 50.8,58.42
LP- on GND "IS_P" (solid, remove dead copper, pour order 25): 50.8,66.675 50.8,82.55 52.07,83.82 53.975,83.82 55.245,85.09 55.245,86.995 56.515,88.265 80.645,88.265 81.28,87.63 81.28,66.929 80.391,66.04 51.435,66.04 50.8,66.675
GND on GND "IS_P" (solid, remove dead copper, pour order 27): 50.8,56.515 50.8,65.151 51.435,65.786 81.026,65.786 81.915,66.675 81.915,87.63 82.55,88.265 123.19,88.265 124.46,86.995 124.46,85.09 125.73,83.82 127.635,83.82 128.905,82.55 128.905,56.515 127.635,55.245 125.73,55.245 124.46,53.975 124.46,52.07 123.19,50.8 56.515,50.8 55.245,52.07 55.245,53.975 53.975,55.245 52.07,55.245 50.8,56.515

## Keep-outs
Keep-Out Layer:
  circle w0.127: c127.5,86.5 r1.55
  circle w0.127: c127.5,52.5 r1.55
  circle w0.127: c52.5,52.5 r1.55
  circle w0.127: c52.5,86.5 r1.55
  lines w0.127: 50,50 50,89 130,89 130,50 50,50

## Silkscreen, mask and mechanical layers (free items; w line width, h text height)
Top Overlay:
  drawing of 744 lines, arcs and shapes, not listed
  text "DGND" at 64.516,86.106 h0.76
  text "VGC" at 84.455,85.979 h1.27
  text "OPEN" at 84.328,83.693 h1.27
  text "3V3" at 77.597,82.677 h0.76 r90
  text "SHORT" at 84.328,81.407 h1.27
  text "Vismon=" at 114.3,81.153 h1
  text "4*R*I(led)" at 114.3,79.248 h1
  text "CTRL" at 111.633,72.771 h1.27
  text "GND" at 120.269,70.739 h1.02
  text "LD+" at 120.777,57.277 h1.02
  text "AOE-R&B-3.3" at 72.644,54.229 h1.6
  text "2015.8" at 80.899,51.435 h1.6
  text "24V" at 57.15,51.181 h1.02
Bottom Overlay:
  circle w0.254: c127.5,86.5 r2.7
  circle w0.254: c127.5,52.5 r2.7
  circle w0.254: c52.5,86.5 r2.7
  circle w0.254: c52.5,52.5 r2.7
  lines w0.051: 68.58,81.683 68.58,82.296 69.215,82.931
  lines w0.254: 50,50 50,89 130,89 130,50 50,50
  text "DGND" at 51.308,83.566 h0.76 r90
  text "PWM" at 51.308,80.264 h0.76 r90
  text "--" at 54.61,79.756 h0.64
  text "+NTC2-" at 129.032,79.375 h0.76 r90
  text "--" at 54.61,77.851 h0.64
  text "TEC" at 51.308,77.724 h0.76 r90
  text "--" at 54.61,75.565 h0.64
  text "LINK" at 51.308,75.184 h0.76 r90
  text "--" at 129.159,74.295 h0.64
  text "+NTC1-" at 129.159,74.168 h0.76 r90
  text "--" at 54.483,71.628 h0.64
  text "GND" at 120.65,71.501 h0.76 r180
  text "CTRL" at 104.394,71.247 h0.76 r180
  text "485" at 51.308,71.12 h0.76 r90
  text "--->" at 112.649,70.993 h0.76 r90
  text "--" at 129.286,69.215 h0.64
  text "3V3" at 51.308,68.072 h0.76 r90
  text "GND" at 129.159,68.072 h0.76 r90
  text "--" at 54.61,67.691 h0.64
  text "--" at 129.286,64.389 h0.64
  text "GND" at 51.562,62.865 h0.76 r90
  text "LD+" at 129.159,62.865 h0.76 r90
  text "24V" at 51.562,58.928 h0.76 r90
  text "LD+" at 120.777,58.166 h0.76 r180
  text "24V" at 57.404,52.07 h0.76 r180
Mechanical 2:
  lines w0.051: 61.595,51.435 61.595,59.055 62.23,59.69 66.04,59.69 66.675,59.055 66.675,51.435 66.04,50.8 62.865,50.8 62.23,50.8 61.595,51.435 ; 99.695,51.435 99.695,63.5 100.33,64.135 108.839,64.135 109.22,63.754 109.22,51.435 108.585,50.8 100.33,50.8 99.695,51.435
Mechanical 3:
  lines w0.051: 115.824,56.769 115.57,56.515 115.57,51.435 116.205,50.8 117.348,50.8 120.65,50.8 121.285,51.435 121.285,57.658 119.38,59.563 117.221,59.563 116.84,59.182 116.84,57.531 116.84,57.15 116.586,56.896 115.951,56.896 ; 50.8,56.515 50.8,58.42 ; 50.8,56.515 52.07,55.245 ; 50.8,56.515 50.8,58.42 ; 50.8,56.515 52.07,55.245 ; 50.8,58.42 52.07,59.69 66.04,59.69 66.675,59.055 66.675,51.435 66.04,50.8 56.515,50.8 ; 52.07,55.245 53.975,55.245 ; 52.07,55.245 53.975,55.245 ; 53.975,55.245 55.245,53.975 ; 53.975,55.245 55.245,53.975 ; 55.245,52.07 55.245,53.975 ; 55.245,52.07 56.515,50.8 ; 55.245,52.07 55.245,53.975 ; 55.245,52.07 56.515,50.8 ; 50.8,60.96 51.435,60.325 66.548,60.325 66.675,60.325 68.326,61.976 68.453,61.976 80.01,61.976 91.44,61.976 91.821,61.976 92.456,62.611 92.456,68.961 93.345,69.85 98.425,69.85 99.06,69.215 99.06,65.405 99.568,64.897 109.982,64.897 115.189,64.897 128.27,64.897 128.905,65.532 128.905,69.342 128.905,82.55 127.635,83.82 125.73,83.82 124.46,85.09 124.46,86.995 123.19,88.265 82.55,88.265 81.915,87.63 81.915,66.675 81.026,65.786 76.2,65.786 51.435,65.786 50.8,65.151 50.8,60.96 ; 50.8,66.675 50.8,82.55 52.07,83.82 53.975,83.82 55.245,85.09 55.245,86.995 56.515,88.265 80.645,88.265 81.28,87.63 81.28,66.929 80.391,66.04 51.435,66.04 50.8,66.675 ; 68.58,51.435 69.215,50.8 70.739,50.8 79.121,50.8 79.756,51.435 79.756,59.055 79.756,60.706 79.121,61.341 69.215,61.341 68.58,60.706 68.58,59.055 68.58,51.435 ; 83.82,51.435 83.82,60.706 84.455,61.341 98.679,61.341 99.314,60.706 99.314,51.435 98.679,50.8 84.455,50.8 83.82,51.435 ; 93.091,61.976 93.091,67.945 93.091,68.707 93.599,69.215 97.79,69.215 98.425,68.58 98.425,64.77 98.425,64.262 98.044,63.881 97.536,63.881 97.155,63.5 97.155,61.849 96.901,61.595 93.472,61.595 93.091,61.976 ; 99.695,51.435 99.695,63.5 100.33,64.135 108.839,64.135 109.22,63.754 109.22,51.435 108.585,50.8 107.315,50.8 100.33,50.8 99.695,51.435 ; 109.855,51.435 110.49,50.8 113.792,50.8 114.3,50.8 114.935,51.435 114.935,60.325 114.3,60.96 113.919,60.96 113.538,60.96 110.744,60.96 110.49,60.96 109.855,60.325 109.855,51.435 ; 115.57,60.452 116.205,59.817 120.015,59.817 121.158,58.674 128.143,58.674 128.27,58.674 128.905,59.309 128.905,60.325 128.905,64.135 128.397,64.643 127.762,64.643 116.078,64.643 115.57,64.135 115.57,60.452
Mechanical 4:
  lines w0.051: 50.8,56.515 52.07,55.245 53.975,55.245 55.245,53.975 55.245,52.07 56.515,50.8 69.215,50.8 98.425,50.8 110.49,50.8 123.19,50.8 124.46,52.07 124.46,53.975 125.73,55.245 127.635,55.245 128.905,56.515 128.905,82.55 127.635,83.82 125.73,83.82 124.46,85.09 124.46,86.995 123.19,88.265 82.55,88.265 81.915,87.63 81.915,66.675 81.026,65.786 51.435,65.786 50.8,65.151 50.8,60.96 50.8,56.515
Mechanical 15:
  lines w0.127: 50.8,56.515 50.8,57.023 50.8,82.55 52.07,83.82 53.975,83.82 55.245,85.09 55.245,86.995 56.515,88.265 123.19,88.265 124.46,86.995 124.46,85.09 125.73,83.82 127.635,83.82 128.905,82.55 128.905,56.515 127.635,55.245 125.73,55.245 124.46,53.975 124.46,52.07 123.19,50.8 56.515,50.8 55.245,52.07 55.245,53.975 53.975,55.245 52.07,55.245 50.8,56.515